# EAGLE board Remote (EAGLE 6.5.0)
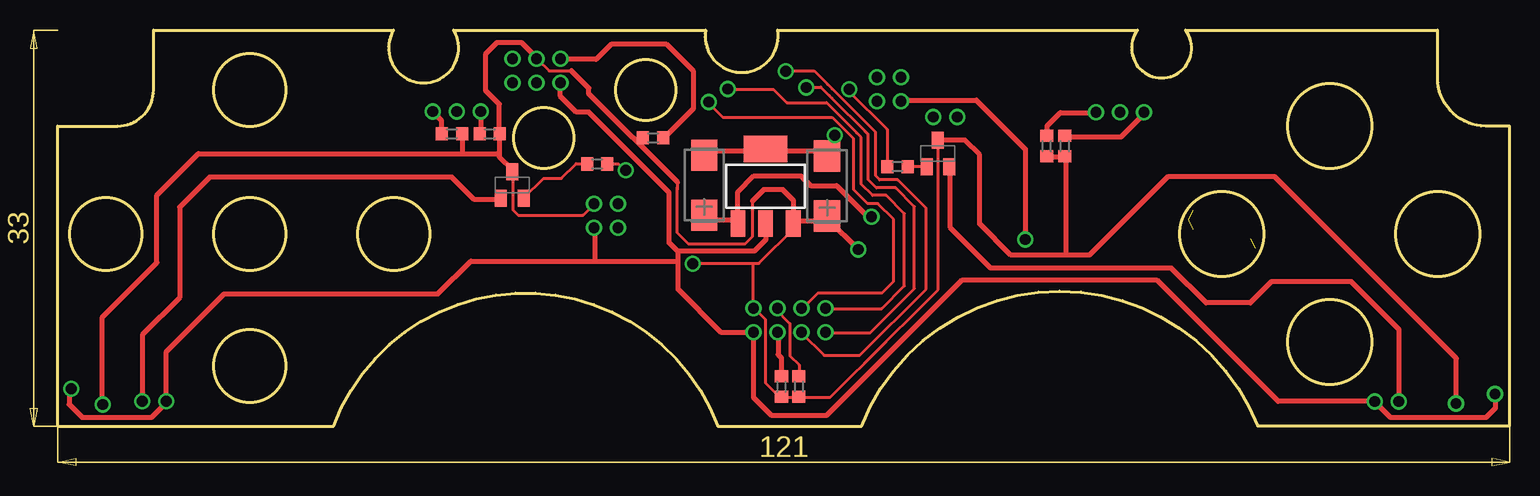
[diagram p0: board, top side]
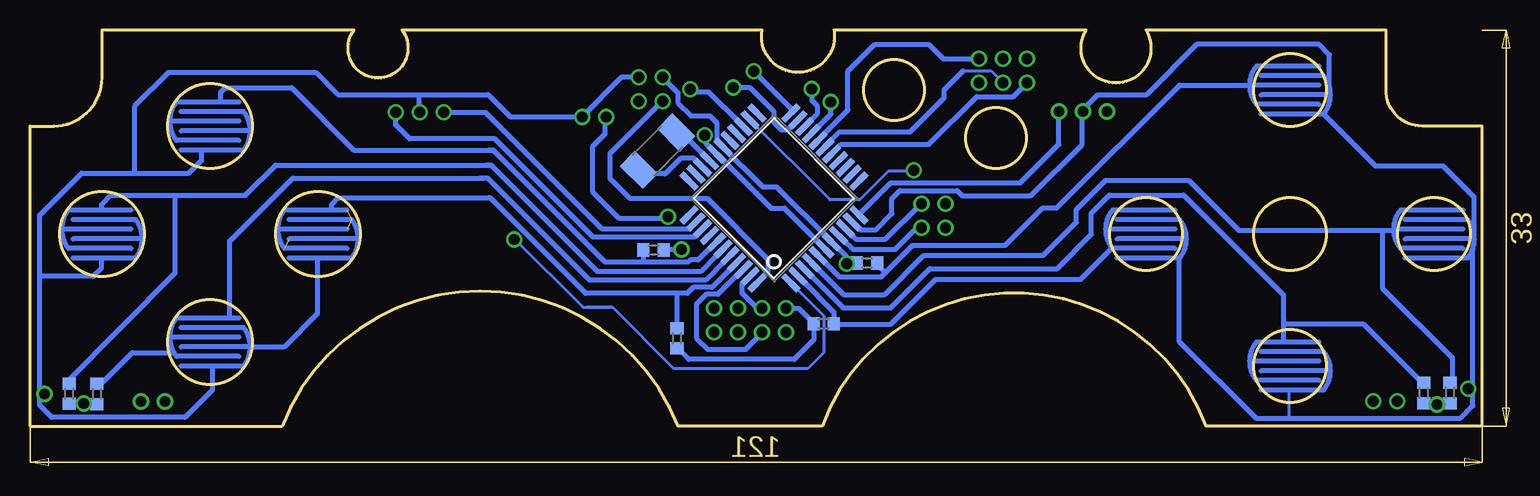
[diagram p1: board, bottom side, seen from below]

Size 121 x 33 mm. Coordinates in mm from the lower left corner, seen from the top.
Outline: 8,33 28,33 arc242 33,33 54,33 arc199 60,33 90,33 arc254 94,33 115,33 115,29 arc90 119,25 121,25 121,0 100,0 arc137 67,0 55,0 arc139 23,0 0,0 0,25 5,25 arc90 8,28 8,33
Outline: circle at 40.5,24 radius 2.5
Outline: circle at 49,28 radius 2.5
Outline: circle at 16,5 radius 3
Outline: circle at 16,28 radius 3
Outline: circle at 28,16 radius 3
Outline: circle at 16,16 radius 3
Outline: circle at 4,16 radius 3
Outline: circle at 97,16 radius 3.5
Outline: circle at 115,16 radius 3.5
Outline: circle at 106,7 radius 3.5
Outline: circle at 106,25 radius 3.5
Copper layers (1*16): Top 0.035mm / dielectric 1.5mm / Bottom 0.035mm
Design rules "default": minimum track width 10mil, minimum drill 24mil, track to track 8mil, track to pad 8mil, pad to pad 8mil, via to via 8mil, smd to smd 8mil, copper to edge 40mil, drill to drill 8mil, minimum pad ring 10mil, minimum via ring 8mil, stop-mask expansion 4mil, vias tented up to drill 0mil, thermal gap 10mil

## Footprints (pad centres in the part's own frame; a part is rotated, then mirrored left to right if it is on the bottom)
SOT223 = smd 1.219 x 2.235: 1 -2.311,-3.099; 2 0,-3.099; 3 2.311,-3.099 | smd 3.6 x 2.2: 4 0,3.099
CT6032 = smd 2.6 x 2.2: + -2.5,0; - 2.5,0
R2010 = smd 1.8 x 2.7: 1 -2.2,0; 2 2.2,0
R0603 = smd 1 x 1.1: 1 -0.85,0; 2 0.85,0
SOT23-BCE = smd 1 x 1.4: B -0.95,-1.1; C 0.95,-1.1; E 0,1.1
QFP44_SOT307-2 = smd 0.5 x 1.8: 1 -4,-6; 2 -3.2,-6; 3 -2.4,-6; 4 -1.6,-6; 5 -0.8,-6; 6 0,-6; 7 0.8,-6; 8 1.6,-6; 9 2.4,-6; 10 3.2,-6; 11 4,-6; 23 4,6; 24 3.2,6; 25 2.4,6; 26 1.6,6; 27 0.8,6; 28 0,6; 29 -0.8,6; 30 -1.6,6; 31 -2.4,6; 32 -3.2,6; 33 -4,6 | smd 1.8 x 0.5: 12 6,-4; 13 6,-3.2; 14 6,-2.4; 15 6,-1.6; 16 6,-0.8; 17 6,0; 18 6,0.8; 19 6,1.6; 20 6,2.4; 21 6,3.2; 22 6,4; 34 -6,4; 35 -6,3.2; 36 -6,2.4; 37 -6,1.6; 38 -6,0.8; 39 -6,0; 40 -6,-0.8; 41 -6,-1.6; 42 -6,-2.4; 43 -6,-3.2; 44 -6,-4

## Placement (x,y rotation side)
E$1  [SOT223]  59,19.98 0 top
E$2  [CT6032]  64.13,20.01 90 top
E$3  [CT6032]  53.88,20.07 90 top
E$4  [R2010]  68.71,22.9 45 bottom
E$5  [R0603]  2.67,2.76 270 bottom
E$7  [R0603]  49.62,24.02 0 top
E$8  [SOT23-BCE]  73.36,22.7 0 top
E$9  [SOT23-BCE]  37.9,20.08 0 top
E$10  [R0603]  69.99,21.61 0 top
E$11  [R0603]  44.97,21.83 0 top
E$13  [R0603]  4.85,2.75 270 bottom
E$14  [R0603]  54.86,8.52 180 bottom
E$15  [R0603]  51.25,13.58 180 bottom
E$16  [R0603]  117.73,2.69 270 bottom
E$17  [R0603]  115.43,2.67 270 bottom
E$18  [R0603]  67.09,7.31 90 bottom
E$19  [R0603]  69.03,14.66 0 bottom
E$22  [R0603]  36.01,24.35 0 top
E$23  [R0603]  32.86,24.34 0 top
E$24  [R0603]  61.77,3.29 90 top
E$25  [R0603]  60.32,3.28 90 top
E$26  [R0603]  82.42,23.32 90 top
E$27  [R0603]  83.93,23.32 90 top
PIC18F4550  [QFP44_SOT307-2]  59,19 45 bottom

## Library data of the parts
E$1 = transistor-pnp
E$2 E$3 = ref-packages
E$4 E$5 E$7 E$10 E$11 E$13-E$19 E$22-E$27 = eagle-ltspice
E$8 E$9 = transistor
PIC18F4550 = micro-philips

## Tracks (layer width: path | path; a pad name or v marks a point on that pad's centre or on a via)
S$1
  Top 0.406: 53.93,22.92 64.01,22.92
S$2
  Top 0.406: 56.78,17.14 54.22,17.14
S$3
  Top 0.406: 61.32,17.12 64.3,17.12 66.58,14.84
S$4
  Bottom 0.406: 54.28,15.42 58.77,19.91 59.91,19.91 63.38,23.37
S$5  (via drill 0.9)
  other vias: 54.26,27
S$6  (via drill 0.9)
  other vias: 64.77,24.22
S$7  (via drill 0.9)
  other vias: 52.93,13.52
S$8
  Bottom 0.406: 53.88,15.04 53,14.16 53,13.68
S$9
  Bottom 0.406: 64.7,24.39 64.7,23.57 64.1,22.96
S$10  (via drill 0.9)
  other vias: 67.83,17.45
S$11
  Top 0.254: 52.95,13.54 58.44,13.54 61.45,16.56
S$12
  Bottom 0.406: 67.06,8.16 67.06,11.01
S$13
  Bottom 0.406: 55.67,8.48 55.67,7.2 57.31,5.56 66.12,5.56 67.05,6.5
S$14  (via drill 0.9)
  other vias: 55.85,28.08
S$15  (via drill 0.9)
  other vias: 62.4,28.2
S$16
  Bottom 0.406: 64.55,22.29 66.83,24.57
S$17
  Bottom 0.406: 65.31,21.93 65.69,22.31 66.77,22.31 68.08,21 69.71,21
S$18  (via drill 0.9)
  other vias: 60.68,29.57
S$19
  Bottom 0.406: 55.81,24.44 54.27,25.98 54.27,26.97
S$20
  Bottom 0.406: 56.7,12.18 54.02,9.49 54.02,8.57
S$21
  Bottom 0.406: 56.43,25.02 55.37,26.08 55.37,26.63 55.83,27.09 55.83,28.07
S$22
  Bottom 0.406: 60.69,29.58 57.44,26.32
S$23
  Bottom 0.406: 62.43,28.21 61.04,28.21 59.04,26.21 59.04,25.33 58.39,24.68 57.85,24.68 57.42,25.12
S$24
  Top 0.254: 57.96,9.82 57.96,13.51
S$25
  Top 0.254: 51.73,14.57 51.53,14.76
S$26
  Bottom 0.406: 61.32,12.18 61.67,11.83 61.67,11.09 60.4,9.82 59.98,9.82
S$27
  Bottom 0.406: 55.76,8.64 56.89,9.77 57.97,9.77
S$28
  Top 0.254: 64.54,25.71 66.33,23.93
S$29
  Bottom 0.406: 63.74,22.64 59.25,18.16 58.14,18.16 54.9,14.91
S$30
  Top 0.254: 57.87,18.72 57.87,15.76 57.27,15.16 52.58,15.16 51.65,16.09 51.65,19.91
S$31
  Top 0.254: 61.96,7.79 63.87,5.88 66.84,5.88 72.38,11.41 72.38,18.15 70.01,20.52 68.5,20.52 68.16,20.86 68.16,24.48
S$32
  Top 0.254: 63.97,7.78 67.73,7.78 71.39,11.44 71.39,18.28 69.83,19.84 68.23,19.84 67.55,20.52 67.55,24.29 67.28,24.56
S$33
  Top 0.254: 64.04,9.78 68.66,9.78 70.56,11.68 70.56,17.69 69.04,19.21 67.91,19.21 66.96,20.16 66.96,24.06 66.59,24.44
S$34
  Top 0.254: 62.06,9.76 63.38,11.09 68.7,11.09 69.66,12.05 69.66,17.23 68.36,18.52 67.5,18.52 66.33,19.7 66.33,23.93
S$35
  Top 0.406: 56.66,17.04 56.66,19.47 58.03,20.84 61.95,20.84 62.76,20.04 64.92,20.04 67.72,17.24
S$36
  Top 0.406: 50.6,24.05 53.01,26.47 53.01,29.55 50.75,31.81 46.13,31.81 44.88,30.56 42.03,30.56
S$37
  Top 0.406: 61.34,17.64 61.34,18.78 60.43,19.69 58.84,19.69 57.9,18.74
S$38
  Top 0.254: 44.29,28.11 44.29,27.69
S$39
  Bottom 0.406: 55.11,24.04 52.84,26.31 52.84,29.56 50.59,31.81 46.11,31.81 44.89,30.59 41.96,30.59
S$40
  Top 0.406: 36.81,24.34 36.81,26.81 35.69,27.93 35.69,31.03 36.62,31.96 38.64,31.96 39.93,30.67
S$41
  Bottom 0.406: 54.65,23.37 53.52,24.5 47.66,24.5 44.83,27.34 44.83,28.01 43.24,29.59
S$42
  Top 0.254: 64.08,26.94 66.89,24.13
S$43
  Top 0.254: 70.79,21.64 72.47,21.64
S$44
  Top 0.406: 36.8,24.3 36.8,22.45 37.87,21.38
S$45  (via drill 0.9)
  other vias: 66.72,14.71
S$46
  Top 0.254: 75.35,12.11 67.75,4.51
S$47
  Top 0.406: 82.45,24.11 82.45,25.02 83.56,26.12 86.56,26.12
S$48
  Top 0.254: 64.31,27.53 67.55,24.3
S$49
  Top 0.254: 64.17,28.47 68.16,24.48
S$50  (via drill 0.9)
  other vias: 47.35,21.31
S$51
  Top 0.254: 67.26,5.26 73.37,11.38 73.37,23.94
S$52
  Top 0.406: 36.95,18.86 34.73,18.86 32.85,20.75 12.67,20.75 10.16,18.23 10.16,10.7 7.06,7.6 7.06,2.05
S$53
  Top 0.406: 44.74,16.52 44.74,13.81
S$54
  Top 0.406: 58.02,7.78 55.32,7.78 51.71,11.38 51.71,14.49
S$55
  Top 0.254: 50.94,15.36 50.94,16.49
S$56  (via drill 0.9)
  other vias: 65.98,28.06
S$57  (via drill 0.9)
  other vias: 3.75,1.8
S$58
  Top 0.254: 45.82,21.85 46.74,21.85 47.37,21.22
S$59
  Bottom 0.254: 18.8,30 arc-77 18.8,26.8
S$60
  Bottom 0.254: 30.8,18 arc-77 30.8,14.8
S$61
  Bottom 0.254: 18.8,7 arc-77 18.8,3.8
S$62
  Bottom 0.406: 13.6,7 18.8,7 arc-77 18.8,3.8 13.6,3.8 | 13.6,5.4 19.2,5.4 | 12.8,4.6 18.4,4.6 | 18.4,6.2 13.2,6.2 arc77 13.2,3 18.4,3
S$63
  Bottom 0.254: 13.2,3 arc-77 13.2,6.2
S$64
  Bottom 0.406: 61.84,25.25 64.42,27.83 66.05,27.83
S$65
  Top 0.254: 65.95,27.89 69.12,24.71 69.12,21.58
S$66
  Top 0.254: 38.86,19 40.49,20.64 41.99,20.64 43.22,21.86 44.21,21.86
S$67
  Bottom 0.254: 6.8,18 arc-77 6.8,14.8
S$68
  Bottom 0.406: 1.6,18 6.8,18 arc-77 6.8,14.8 1.6,14.8 | 1.6,16.4 7.2,16.4 | 0.8,15.6 6.4,15.6 | 6.4,17.2 1.2,17.2 arc77 1.2,14 6.4,14
S$69
  Bottom 0.406: 13.6,30 18.8,30 arc-77 18.8,26.8 13.6,26.8 | 13.6,28.4 19.2,28.4 | 12.8,27.6 18.4,27.6 | 18.4,29.2 13.2,29.2 arc77 13.2,26 18.4,26
S$70
  Bottom 0.254: 25.2,14 arc-77 25.2,17.2
S$71
  Bottom 0.406: 25.6,18 30.8,18 arc-77 30.8,14.8 25.6,14.8 | 25.6,16.4 31.2,16.4 | 24.8,15.6 30.4,15.6 | 30.4,17.2 25.2,17.2 arc77 25.2,14 30.4,14
S$72
  Bottom 0.406: 5,3.6 9.87,8.47 16.49,8.47
S$73
  Bottom 0.254: 13.2,26 arc-77 13.2,29.2
S$74
  Bottom 0.406: 2.45,3.67 2.45,5.65 8.25,11.45 8.25,16.2
S$75
  Bottom 0.406: 54.02,8.48 49.29,8.48 45.54,12.22 33.46,12.22 30.89,14.79
S$76
  Bottom 0.406: 56.2,12.8 53.24,9.85 49.27,9.85 46.01,13.11 35.41,13.11 32.55,15.97 32.55,17.74 31.06,19.23 24.87,19.23 16.55,10.92 16.55,7.05
S$77
  Bottom 0.406: 2.66,1.82 5.21,1.83
S$78
  Bottom 0.406: 13.24,26.01 8.91,21.68 3.26,21.68 0.68,19.11 0.68,16.17
S$79
  Top 0.406: 3.72,1.74 3.72,9.07 8.26,13.61 8.26,19.23 11.74,22.7 36.66,22.7
S$80  (via drill 0.9)
  other vias: 116.53,1.87
S$81
  Top 0.406: 0.96,3.1 0.96,1.8 2.04,0.72 7.84,0.72 9.11,1.99
S$82
  Bottom 0.406: 55.51,13.29 53.17,10.94 49.79,10.94 46.52,14.21 36.56,14.21 33.81,16.96 33.81,18.02 31.36,20.47 24.44,20.47 20.27,16.3 7.38,16.3
S$83
  Bottom 0.254: 16.11,3.02 16.11,0.63
S$84
  Bottom 0.406: 55.03,13.89 53.58,12.43 50.05,12.43 47.44,15.04 39.74,15.04 36.6,18.18 35.43,18.18 25.2,28.41 19.39,28.41
S$85
  Bottom 0.406: 61.93,12.71 63.67,10.96 64.67,10.96 65.47,10.15 65.47,7.32 64.53,6.38 61.36,6.38 60.02,7.72
S$86
  Bottom 0.406: 52.08,16.62 51.84,16.38 50.47,16.38 49.17,17.68 49.17,18.94 48.5,19.61 43.74,19.61 43.33,19.2 37.59,19.2 33.33,23.45 33.33,26.27
S$87
  Bottom 0.406: 52.63,16.03 52.15,15.55 49.74,15.55 46.79,18.5
S$88
  Bottom 0.406: 53.22,15.52 52.41,14.72 48.89,14.72 47.09,16.51
S$89
  Bottom 0.406: 50.29,13.37 49.7,12.78
S$90
  Bottom 0.406: 51.91,17.63 49.29,20.25 38.48,20.25 35.26,23.46 35.26,26.13
S$91
  Bottom 0.406: 12.72,28.23 12.72,30.96 13.57,31.81 23.77,31.81 27.99,27.58 32.05,27.58 33.34,26.29
S$92
  Top 0.254: 101.58,2.06 91.53,12.11
S$93
  Bottom 0.406: 112.6,18 117.8,18 arc-77 117.8,14.8 112.6,14.8 | 112.6,16.4 118.2,16.4 | 111.8,15.6 117.4,15.6 | 117.4,17.2 112.2,17.2 arc77 112.2,14 117.4,14
S$94
  Bottom 0.406: 103.6,9 108.8,9 arc-77 108.8,5.8 103.6,5.8 | 103.6,7.4 109.2,7.4 | 102.8,6.6 108.4,6.6 | 108.4,8.2 103.2,8.2 arc77 103.2,5 108.4,5
S$95
  Bottom 0.406: 103.6,27 108.8,27 arc-77 108.8,23.8 103.6,23.8 | 103.6,25.4 109.2,25.4 | 102.8,24.6 108.4,24.6 | 108.4,26.2 103.2,26.2 arc77 103.2,23 108.4,23
S$96  (3 unrouted)
  Bottom 0.406: 94.6,18 99.8,18 arc-77 99.8,14.8 94.6,14.8 | 94.6,16.4 100.2,16.4 | 93.8,15.6 99.4,15.6 | 99.4,17.2 94.2,17.2 arc77 94.2,14 99.4,14
S$97
  Bottom 0.254: 112.6,16.4 118.3,16.4
S$98
  Bottom 0.254: 117.4,17.2 112.2,17.2 arc77 112.2,14 117.4,14
S$99
  Bottom 0.254: 111.7,15.6 117.4,15.6
S$100
  Bottom 0.254: 112.6,18 117.8,18 arc-77 117.8,14.8 112.6,14.8
S$101
  Bottom 0.254: 103.6,25.4 109.3,25.4
S$102
  Bottom 0.254: 108.4,26.2 103.2,26.2 arc77 103.2,23 108.4,23
S$103
  Bottom 0.254: 102.7,24.6 108.4,24.6
S$104
  Bottom 0.254: 103.6,27 108.8,27 arc-77 108.8,23.8 103.6,23.8
S$105
  Bottom 0.254: 103.6,7.4 109.3,7.4
S$106
  Bottom 0.254: 108.4,8.2 103.2,8.2 arc77 103.2,5 108.4,5
S$107
  Bottom 0.254: 102.7,6.6 108.4,6.6
S$108
  Bottom 0.254: 103.6,9 108.8,9 arc-77 108.8,5.8 103.6,5.8
S$109
  Bottom 0.254: 54.32,18.84 61.13,25.66
S$110
  Bottom 0.406: 115.08,13.98 115.08,13.1 115.71,12.47 120.14,12.47
S$111
  Bottom 0.406: 115.04,18.06 115.04,18.46 114.27,19.22 103.04,19.22 100.53,21.74 82.73,21.74
S$112
  Bottom 0.406: 97.05,13.99 97.05,9.35 99.82,6.58 102.61,6.58
S$113  (via drill 0.9)
  other vias: 119.79,2.66
S$114
  Top 0.406: 119.81,2.66 119.81,1.5 119.02,0.71 111.08,0.71 109.72,2.07
S$115
  Bottom 0.406: 115.09,1.86 117.96,1.86
S$116
  Bottom 0.406: 104.36,9.05 104.36,15.4 99.1,20.66 83.14,20.66
S$117
  Bottom 0.406: 114.97,3.62 112.48,6.12 109.1,6.12
S$118
  Bottom 0.406: 62.57,13.15 64.16,11.56 65.71,11.56 66.21,11.06 74.69,11.06 82.64,19 82.85,19
S$119
  Bottom 0.406: 63.09,13.76 64.7,12.15 74.36,12.15 82.87,20.66 83.48,20.66
S$120
  Bottom 0.406: 63.71,14.28 65.12,12.87 73.7,12.87 82.58,21.74 83,21.74
S$121
  Bottom 0.406: 66.72,14.7 68.26,14.7
S$122
  Bottom 0.406: 69.92,14.66 69.92,13.68
S$123
  Bottom 0.406: 67.94,17.28 71.89,17.28 74.1,19.49 74.1,23.32 73.07,24.35 73.07,25.72
S$124
  Bottom 0.254: 63.67,23.66 63.79,23.77
S$125
  Bottom 0.406: 68.28,27.09 72.68,22.7 72.68,20.63 71.01,18.96 64.58,18.96 59.5,13.89 59.5,12.85 60.26,12.1
S$126
  Bottom 0.406: 88.54,26.16 88.54,27.56
S$127
  Bottom 0.406: 70.26,29.04 71.72,29.04 75,25.77
S$128
  Bottom 0.406: 68.27,29.03 67.02,27.78 67.02,26.96 65.91,25.85 64.35,25.85 63.79,25.29 63.79,23.74
S$129  (via drill 0.9)
  other vias: 7.05,2.05
S$130
  Top 0.406: 70.3,27.15 76.57,27.15 80.65,23.07 80.65,15.67
S$131
  Bottom 0.406: 54,22.89 53.42,23.46 46.1,23.46 42.12,27.45 39.05,27.45 37.93,28.56
S$132  (via drill 0.9)
  other vias: 9.05,2.05
S$133
  Top 0.406: 9.07,2.04 9.07,6.2 13.88,11.01 31.7,11.01 34.44,13.75 51.7,13.75
S$134  (via drill 0.9)
  other vias: 80.64,15.54
S$135
  Top 0.406: 51.66,20.29 44.27,27.68 44.27,28.15 42.81,29.61
S$137
  Bottom 0.406: 25.25,14.01 25.25,7.07 18.83,0.65 1.77,0.65 0.76,1.67 0.76,14.74
S$139
  Bottom 0.254: 57.36,11.69 54.87,9.2 54.87,6.11 56.2,4.79 67.33,4.79 72.44,9.89 74.61,9.89
S$140
  Bottom 0.406: 52.15,13.59 52.93,13.59
S$141
  Bottom 0.254: 80.67,15.66 74.9,9.89 72.64,9.89
S$142
  Top 0.406: 109.73,2.06 101.71,2.06 91.62,12.14 75.35,12.14 64.06,0.86 59.52,0.86 58.03,2.35 58.03,7.72
S$143  (via drill 0.9)
  other vias: 109.76,2.05
S$144
  Bottom 0.254: 47.35,21.22 49.49,21.22 51.87,18.84 54.32,18.84
S$145
  Top 0.406: 116.56,1.85 116.56,5.63 101.43,20.75
S$146
  Top 0.254: 60.32,2.38 64.37,2.38 69.08,7.08
S$147
  Top 0.254: 37.93,21.13 37.93,18.01 38.38,17.56 43.79,17.56 44.75,18.52
S$148  (via drill 0.9)
  other vias: 31.26,26.22
S$149
  Bottom 0.406: 64.3,14.87 65.31,13.85 65.97,13.85 66.17,13.66 73.07,13.66 82.41,23 82.77,23
S$150
  Bottom 0.406: 117.91,3.69 108.91,12.77 108.91,19.12
S$151
  Bottom 0.406: 105.81,4.91 105.81,2.98 108.07,0.72 119.19,0.72 120.21,1.73 120.21,17.57 116.69,21.08 107.75,21.08 106.69,22.14 106.69,22.91
S$152
  Top 0.406: 101.43,20.75 92.49,20.75 85.97,14.23 79.45,14.23 76.83,16.85 76.83,22.6 75.6,23.83 73.42,23.83
S$153
  Top 0.406: 35.26,26.2 35.26,24.39
S$154
  Top 0.406: 32,24.25 32,25.45 31.3,26.14
S$155
  Bottom 0.406: 95.87,18.02 95.87,18.42 95.29,19 82.69,19
S$156
  Bottom 0.406: 112.25,21.16 112.25,26.67 109.45,29.47 97.2,29.47 95.35,27.61 82.83,27.61 80.99,25.78 75,25.78
S$157
  Bottom 0.406: 105.08,27.04 105.08,27.83 104.71,28.2 99.21,28.2 94,23 82.44,23
S$158
  Bottom 0.254: 43.24,29.6 40.91,29.6 39.91,28.61
S$159
  Bottom 0.406: 65.36,16 65.63,15.74 74.07,15.74 82.26,23.92 89.36,23.92 90.53,25.1 90.53,26.08
S$160
  Bottom 0.406: 66.1,16.41 73.31,16.41 83.02,26.12 86.6,26.12
S$162  (via drill 0.9)
  other vias: 111.76,2.05
S$163
  Top 0.406: 33.73,24.34 33.73,22.8
S$164
  Top 0.406: 64.76,24.24 64.76,22.76
S$165
  Top 0.406: 83.85,24.1 88.63,24.1 90.55,26.01
S$166  (via drill 0.9)
  other vias: 86.53,26.14
S$168
  Top 0.254: 59.76,9.8 61.03,8.53 61.03,5.85 61.8,5.08 61.8,4.01
S$169
  Top 0.406: 60.05,7.77 60.05,5.94 60.31,5.68 60.3,4.09
S$173
  Bottom 0.254: 66.44,13.66 69.03,13.66
S$174  (via drill 0.9)
  other vias: 57.99,9.8
S$175  (via drill 0.7)
  other vias: 88.53,26.13
S$176  (via drill 0.9)
  other vias: 59.99,9.8
S$177
  Top 0.254: 60.69,29.6 63.04,29.6 64.55,28.09
S$178
  Top 0.254: 62.39,28.23 63.61,28.23 64.51,27.33
S$179
  Bottom 0.254: 65.65,15.73 65.25,16.13
S$180
  Top 0.254: 55.87,28.06 59.66,28.06 60.77,26.94 64.08,26.94
S$181
  Top 0.406: 111.8,2.05 111.8,8.04 107.81,12.03 101.16,12.03 99.39,10.27 95.71,10.27 92.81,13.16 77.75,13.16 74.4,16.52 74.4,21.72
S$182
  Top 0.406: 82.4,22.45 84,22.45 84,14.34
S$183
  Top 0.406: 59.02,16.29 59.02,15.53 58.05,14.57 51.66,14.57 50.97,15.26 50.97,19.46 44.26,26.16 43.24,26.16 41.91,27.5 41.91,28.61
S$184  (via drill 0.9)
  other vias: 44.7,18.52
S$185  (via drill 0.9)
  other vias: 46.7,18.52
S$186  (via drill 0.9)
  other vias: 44.7,16.52
S$187  (via drill 0.9)
  other vias: 46.7,16.52
S$188
  Top 0.254: 39.96,30.58 40.95,29.59 42.8,29.59
S$189  (via drill 0.9)
  other vias: 33.26,26.22
S$190  (via drill 0.9)
  other vias: 35.26,26.22
S$191  (via drill 0.9)
  other vias: 88.53,26.14
S$192  (via drill 0.9)
  other vias: 90.53,26.14
S$193  (via drill 0.9)
  other vias: 61.99,9.8
S$194  (via drill 0.9)
  other vias: 63.99,9.8
S$195  (via drill 0.9)
  other vias: 63.99,7.8
S$196  (via drill 0.9)
  other vias: 61.99,7.8
S$197  (via drill 0.9)
  other vias: 57.99,7.8
S$198  (via drill 0.9)
  other vias: 59.99,7.8
S$199
  Top 0.254: 51.65,20.33 51.65,19.7
S$200
  Top 0.254: 54.23,26.93 55.45,25.71 64.54,25.71
S$201
  Top 0.254: 58.05,9.83 58.99,8.88 58.99,3.6 60.44,2.15
S$202  (via drill 0.9)
  other vias: 37.91,30.59
S$203  (via drill 0.9)
  other vias: 39.91,30.59
S$204  (via drill 0.9)
  other vias: 41.91,30.59
S$205  (via drill 0.9)
  other vias: 41.91,28.59
S$206  (via drill 0.9)
  other vias: 39.91,28.59
S$207  (via drill 0.9)
  other vias: 37.91,28.59
S$209  (via drill 0.9)
  other vias: 1.15,3.09
S$211  (via drill 0.9)
  other vias: 72.97,25.74
S$212  (via drill 0.9)
  other vias: 74.97,25.74
S$213  (via drill 0.9)
  other vias: 68.28,29.06
S$214  (via drill 0.9)
  other vias: 70.28,29.06
S$215  (via drill 0.9)
  other vias: 68.28,27.06
S$216  (via drill 0.9)
  other vias: 70.28,27.06

## Text on the board
tOrigins: Programmer | 7805 | 100uF | 100uF
tDocu: UART | R1 R2 | Power | L1 L2 | VDD | SCL | I2C | VCC | SDA | Analog / Sticks | Rumble / Motor | Rumble / Motor